# EAGLE board CT_schematic (EAGLE 7.6.0)

Size 100 x 80 mm. Coordinates in mm from the lower left corner, seen from the top.
Outline: 0,0 100,0 100,80 0,80 0,0
Copper layers (1*16): Top 0.035mm / dielectric 1.5mm / Bottom 0.035mm
Design rules "default": minimum track width 10mil, minimum drill 24mil, track to track 8mil, track to pad 8mil, pad to pad 8mil, via to via 8mil, smd to smd 8mil, copper to edge 40mil, drill to drill 8mil, minimum pad ring 10mil, minimum via ring 8mil, stop-mask expansion 4mil, vias tented up to drill 0mil, thermal gap 10mil

## Footprints (pad centres in the part's own frame; a part is rotated, then mirrored left to right if it is on the bottom)
C0603 = smd 0.8 x 0.8: 1 -0.762,0; 2 0.762,0
C0402 = smd 0.5 x 0.5: 1 -0.508,0; 2 0.508,0
C1206 = smd 1.3 x 1.6: 1 -1.524,0; 2 1.524,0
C1210 = smd 1.2 x 2.5: 1 -1.524,0; 2 1.524,0
EXV-9H = smd 3.505 x 1.676: 1 -2.857,0; 2 2.857,0
L0603 = smd 0.8 x 0.8: 1 -0.762,0; 2 0.762,0
PJ-037B_PACKAGE = drill 3.7 square: 1 12,0 | drill 3.2 square: 2 6,0
R0603 = smd 0.8 x 0.8: 1 -0.762,0; 2 0.762,0
LQFP208 = smd 0.3 x 1.2: 1 -12.75,-14.4; 2 -12.25,-14.4; 3 -11.75,-14.4; 4 -11.25,-14.4; 5 -10.75,-14.4; 6 -10.25,-14.4; 7 -9.75,-14.4; 8 -9.25,-14.4; 9 -8.75,-14.4; 10 -8.25,-14.4; 11 -7.75,-14.4; 12 -7.25,-14.4; 13 -6.75,-14.4; 14 -6.25,-14.4; 15 -5.75,-14.4; 16 -5.25,-14.4; 17 -4.75,-14.4; 18 -4.25,-14.4; 19 -3.75,-14.4; 20 -3.25,-14.4; 21 -2.75,-14.4; 22 -2.25,-14.4; 23 -1.75,-14.4; 24 -1.25,-14.4; 25 -0.75,-14.4; 26 -0.25,-14.4; 27 0.25,-14.4; 28 0.75,-14.4; 29 1.25,-14.4; 30 1.75,-14.4; 31 2.25,-14.4; 32 2.75,-14.4; 33 3.25,-14.4; 34 3.75,-14.4; 35 4.25,-14.4; 36 4.75,-14.4; 37 5.25,-14.4; 38 5.75,-14.4; 39 6.25,-14.4; 40 6.75,-14.4; 41 7.25,-14.4; 42 7.75,-14.4; 43 8.25,-14.4; 44 8.75,-14.4; 45 9.25,-14.4; 46 9.75,-14.4; 47 10.25,-14.4; 48 10.75,-14.4; 49 11.25,-14.4; 50 11.75,-14.4; 51 12.25,-14.4; 52 12.75,-14.4; 105 12.75,14.4; 106 12.25,14.4; 107 11.75,14.4; 108 11.25,14.4; 109 10.75,14.4; 110 10.25,14.4; 111 9.75,14.4; 112 9.25,14.4; 113 8.75,14.4; 114 8.25,14.4; 115 7.75,14.4; 116 7.25,14.4; 117 6.75,14.4; 118 6.25,14.4; 119 5.75,14.4; 120 5.25,14.4; 121 4.75,14.4; 122 4.25,14.4; 123 3.75,14.4; 124 3.25,14.4; 125 2.75,14.4; 126 2.25,14.4; 127 1.75,14.4; 128 1.25,14.4; 129 0.75,14.4; 130 0.25,14.4; 131 -0.25,14.4; 132 -0.75,14.4; 133 -1.25,14.4; 134 -1.75,14.4; 135 -2.25,14.4; 136 -2.75,14.4; 137 -3.25,14.4; 138 -3.75,14.4; 139 -4.25,14.4; 140 -4.75,14.4; 141 -5.25,14.4; 142 -5.75,14.4; 143 -6.25,14.4; 144 -6.75,14.4; 145 -7.25,14.4; 146 -7.75,14.4; 147 -8.25,14.4; 148 -8.75,14.4; 149 -9.25,14.4; 150 -9.75,14.4; 151 -10.25,14.4; 152 -10.75,14.4; 153 -11.25,14.4; 154 -11.75,14.4; 155 -12.25,14.4; 156 -12.75,14.4 | smd 1.2 x 0.3: 53 14.4,-12.75; 54 14.4,-12.25; 55 14.4,-11.75; 56 14.4,-11.25; 57 14.4,-10.75; 58 14.4,-10.25; 59 14.4,-9.75; 60 14.4,-9.25; 61 14.4,-8.75; 62 14.4,-8.25; 63 14.4,-7.75; 64 14.4,-7.25; 65 14.4,-6.75; 66 14.4,-6.25; 67 14.4,-5.75; 68 14.4,-5.25; 69 14.4,-4.75; 70 14.4,-4.25; 71 14.4,-3.75; 72 14.4,-3.25; 73 14.4,-2.75; 74 14.4,-2.25; 75 14.4,-1.75; 76 14.4,-1.25; 77 14.4,-0.75; 78 14.4,-0.25; 79 14.4,0.25; 80 14.4,0.75; 81 14.4,1.25; 82 14.4,1.75; 83 14.4,2.25; 84 14.4,2.75; 85 14.4,3.25; 86 14.4,3.75; 87 14.4,4.25; 88 14.4,4.75; 89 14.4,5.25; 90 14.4,5.75; 91 14.4,6.25; 92 14.4,6.75; 93 14.4,7.25; 94 14.4,7.75; 95 14.4,8.25; 96 14.4,8.75; 97 14.4,9.25; 98 14.4,9.75; 99 14.4,10.25; 100 14.4,10.75; 101 14.4,11.25; 102 14.4,11.75; 103 14.4,12.25; 104 14.4,12.75; 157 -14.4,12.75; 158 -14.4,12.25; 159 -14.4,11.75; 160 -14.4,11.25; 161 -14.4,10.75; 162 -14.4,10.25; 163 -14.4,9.75; 164 -14.4,9.25; 165 -14.4,8.75; 166 -14.4,8.25; 167 -14.4,7.75; 168 -14.4,7.25; 169 -14.4,6.75; 170 -14.4,6.25; 171 -14.4,5.75; 172 -14.4,5.25; 173 -14.4,4.75; 174 -14.4,4.25; 175 -14.4,3.75; 176 -14.4,3.25; 177 -14.4,2.75; 178 -14.4,2.25; 179 -14.4,1.75; 180 -14.4,1.25; 181 -14.4,0.75; 182 -14.4,0.25; 183 -14.4,-0.25; 184 -14.4,-0.75; 185 -14.4,-1.25; 186 -14.4,-1.75; 187 -14.4,-2.25; 188 -14.4,-2.75; 189 -14.4,-3.25; 190 -14.4,-3.75; 191 -14.4,-4.25; 192 -14.4,-4.75; 193 -14.4,-5.25; 194 -14.4,-5.75; 195 -14.4,-6.25; 196 -14.4,-6.75; 197 -14.4,-7.25; 198 -14.4,-7.75; 199 -14.4,-8.25; 200 -14.4,-8.75; 201 -14.4,-9.25; 202 -14.4,-9.75; 203 -14.4,-10.25; 204 -14.4,-10.75; 205 -14.4,-11.25; 206 -14.4,-11.75; 207 -14.4,-12.25; 208 -14.4,-12.75
SOT-23-8 = smd 0.4 x 1.2: 1 -0.975,-1.3; 2 -0.325,-1.3; 3 0.325,-1.3; 4 0.975,-1.3; 5 0.975,1.3; 6 0.325,1.3; 7 -0.325,1.3; 8 -0.975,1.3
182-009-MALE = drill 1.194 pad 1.524 octagon: 1 -5.537,10.923; 2 -2.769,10.923; 3 0,10.923; 4 2.769,10.923; 5 5.537,10.923; 6 -4.153,8.08; 7 -1.384,8.08; 8 1.384,8.08; 9 4.153,8.08 | hole 3.048: -12.446,9.501; 12.446,9.501
MBH7BLZ02-109004 = smd 0.5 x 0.5: 1 0,0; 15 9.85,0; 27 9.85,8.45; 41 0,8.45 | smd 0.45 x 0.5: 2 0.725,0; 3 1.425,0; 4 2.125,0; 5 2.825,0; 6 3.525,0; 7 4.225,0; 8 4.925,0; 9 5.625,0; 10 6.325,0; 11 7.025,0; 12 7.725,0; 13 8.425,0; 14 9.125,0 | smd 0.5 x 0.45: 16 9.85,0.725; 17 9.85,1.425; 18 9.85,2.125; 19 9.85,2.825; 20 9.85,3.525; 21 9.85,4.225; 22 9.85,4.925; 23 9.85,5.625; 24 9.85,6.325; 25 9.85,7.025; 26 9.85,7.725; 28 9.15,8.45; 29 8.45,8.45; 30 7.75,8.45; 31 7.05,8.45; 32 6.35,8.45; 33 5.65,8.45; 34 4.95,8.45; 35 4.25,8.45; 36 3.55,8.45; 37 2.85,8.45; 38 2.15,8.45; 39 1.45,8.45; 40 0.75,8.45; 42 0,7.75; 43 0,7.05; 44 0,6.35; 45 0,5.65; 46 0,4.95; 47 0,4.25; 48 0,3.55; 49 0,2.85; 50 0,2.15; 51 0,1.45; 52 0,0.75 | smd 3 x 2.5: 53 3.225,2.775; 54 6.625,2.775; 55 6.625,5.675; 56 3.225,5.675
VFBGA-63 = smd 0.4 x 0.4: A1 -3.6,4.4; A2 -2.8,4.4; A9 2.8,4.4; A10 3.6,4.4; B1 -3.6,3.6; B9 2.8,3.6; B10 3.6,3.6; C3 -2,2.8; C4 -1.2,2.8; C5 -0.4,2.8; C6 0.4,2.8; C7 1.2,2.8; C8 2,2.8; D3 -2,2; D4 -1.2,2; D5 -0.4,2; D6 0.4,2; D7 1.2,2; D8 2,2; E3 -2,1.2; E4 -1.2,1.2; E5 -0.4,1.2; E6 0.4,1.2; E7 1.2,1.2; E8 2,1.2; F3 -2,0.4; F4 -1.2,0.4; F5 -0.4,0.4; F6 0.4,0.4; F7 1.2,0.4; F8 2,0.4; G3 -2,-0.4; G4 -1.2,-0.4; G5 -0.4,-0.4; G6 0.4,-0.4; G7 1.2,-0.4; G8 2,-0.4; H3 -2,-1.2; H4 -1.2,-1.2; H5 -0.4,-1.2; H6 0.4,-1.2; H7 1.2,-1.2; H8 2,-1.2; J3 -2,-2; J4 -1.2,-2; J5 -0.4,-2; J6 0.4,-2; J7 1.2,-2; J8 2,-2; K3 -2,-2.8; K4 -1.2,-2.8; K5 -0.4,-2.8; K6 0.4,-2.8; K7 1.2,-2.8; K8 2,-2.8; L1 -3.6,-3.6; L2 -2.8,-3.6; L9 2.8,-3.6; L10 3.6,-3.6; M1 -3.6,-4.4; M2 -2.8,-4.4; M9 2.8,-4.4; M10 3.6,-4.4
S25FL128SDSMFI000 = smd 0.5 x 1.6: 1 0,0; 2 1.27,0; 3 2.54,0; 4 3.81,0; 5 5.08,0; 6 6.35,0; 7 7.62,0; 8 8.89,0; 9 8.89,8.9; 10 7.62,8.9; 11 6.35,8.9; 12 5.08,8.9; 13 3.81,8.9; 14 2.54,8.9; 15 1.27,8.9; 16 0,8.9
ABLS-25.000MHZ-B2F-T = smd 5.6 x 2.8: 1 -3.81,0; 2 5.69,0
ASEK = smd 1.4 x 1: 1 -1.1,-0.8; 2 1.1,-0.8; 3 1.1,0.8; 4 -1.1,0.8
WSON-8 = smd 0.3 x 0.6: 1 -0.75,0; 2 0.05,0; 3 0.85,0; 4 1.65,0; 5 1.65,3.8; 6 0.85,3.8; 7 0.05,3.8; 8 -0.75,3.8 | smd 3 x 2.6: PAD 0.45,1.9
SON-6 = smd 0.55 x 0.3: 1 -0.355,0.5 | smd 0.52 x 0.3: 2 -0.37,0; 3 -0.37,-0.5; 4 0.37,-0.5; 5 0.37,0; 6 0.37,0.5
SW_4-1437565-2 = smd 1.4 x 2.1: 1 -2.23,4.55; 2 -2.23,-4.55; 3 2.23,4.55; 4 2.23,-4.55
LGM67K-G1J2-24-Z = smd 0.8 x 1.4: A -2,0; C 0,0
NC7SZ125M5X = smd 1.3 x 0.7: 1 -1.3,0.95; 2 -1.3,0; 3 -1.3,-0.95; 4 1.3,-0.95; 5 1.3,0.95
DUMMY_PACKAGE_198 = drill 0.3: 1 0,-1; 2 1.5,-1

## Placement (x,y rotation side)
C1  1e-06  [C0603]  -44.45,76.2 0 top  (outside the outline)
C2  1e-07  [C0603]  -48.26,76.2 0 top  (outside the outline)
C3  1e-07  [C0603]  -52.07,76.2 0 top  (outside the outline)
C4  1e-07  [C0603]  -55.88,76.2 0 top  (outside the outline)
C5  1e-07  [C0603]  -59.69,76.2 0 top  (outside the outline)
C6  1e-07  [C0603]  -63.5,76.2 0 top  (outside the outline)
C7  1e-07  [C0603]  -67.31,76.2 0 top  (outside the outline)
C8  1e-07  [C0603]  -71.12,76.2 0 top  (outside the outline)
C9  1e-07  [C0603]  -74.93,76.2 0 top  (outside the outline)
C10  1e-07  [C0603]  -78.74,76.2 0 top  (outside the outline)
C11  1e-07  [C0603]  -82.55,76.2 0 top  (outside the outline)
C12  1e-07  [C0603]  -15.24,81.28 0 top  (outside the outline)
C13  1e-07  [C0603]  -19.05,81.28 0 top  (outside the outline)
C14  1e-07  [C0603]  -22.86,81.28 0 top  (outside the outline)
C15  1e-07  [C0603]  -26.67,81.28 0 top  (outside the outline)
C16  1e-07  [C0603]  -30.48,81.28 0 top  (outside the outline)
C17  1e-07  [C0603]  -34.29,81.28 0 top  (outside the outline)
C18  1e-07  [C0603]  -38.1,81.28 0 top  (outside the outline)
C19  1e-07  [C0603]  -41.91,81.28 0 top  (outside the outline)
C20  4.7e-06  [C0603]  -29.21,76.2 0 top  (outside the outline)
C21  1e-07  [C0603]  -45.72,81.28 0 top  (outside the outline)
C22  2.2e-06  [C0603]  -33.02,76.2 0 top  (outside the outline)
C23  2.2e-06  [C0603]  -36.83,76.2 0 top  (outside the outline)
C24  1e-08  [C0603]  -49.53,81.28 0 top  (outside the outline)
C25  1e-06  [C0603]  -53.34,81.28 0 top  (outside the outline)
C26  1e-07  [C0603]  -57.15,81.28 0 top  (outside the outline)
C27  1e-11  [C0402]  -30.48,86.36 0 top  (outside the outline)
C28  1e-11  [C0402]  -34.29,86.36 0 top  (outside the outline)
C29  1e-07  [C0402]  -38.1,86.36 0 top  (outside the outline)
C30  1e-07  [C0402]  -41.91,86.36 0 top  (outside the outline)
C31  1e-07  [C0402]  -45.72,86.36 0 top  (outside the outline)
C32  1e-07  [C0402]  -49.53,86.36 0 top  (outside the outline)
C33  1e-07  [C0402]  -53.34,86.36 0 top  (outside the outline)
C34  1e-07  [C0402]  -57.15,86.36 0 top  (outside the outline)
C35  1e-07  [C0402]  -60.96,86.36 0 top  (outside the outline)
C36  2.2e-06  [C0603]  -40.64,76.2 0 top  (outside the outline)
C37  1e-06  [C0603]  -60.96,81.28 0 top  (outside the outline)
C38  1e-06  [C0603]  -64.77,81.28 0 top  (outside the outline)
C39  1e-08  [C0402]  -64.77,86.36 0 top  (outside the outline)
C40  1e-08  [C0402]  -68.58,86.36 0 top  (outside the outline)
C41  1e-05  [C1206]  -66.04,62.23 0 top  (outside the outline)
C42  1e-05  [C1210]  -59.69,62.23 0 top  (outside the outline)
C43  1e-07  [C0402]  -72.39,86.36 0 top  (outside the outline)
C44  0.0001  [EXV-9H]  -77.47,50.8 0 top  (outside the outline)
C45  0.0001  [EXV-9H]  -17.78,63.5 0 top  (outside the outline)
C46  1e-08  [C0402]  -76.2,86.36 0 top  (outside the outline)
C47  1e-08  [C0402]  -80.01,86.36 0 top  (outside the outline)
C48  1e-08  [C0402]  -83.82,86.36 0 top  (outside the outline)
F1  240.0  [L0603]  -68.58,81.28 0 top  (outside the outline)
J1  PJ-037B  [PJ-037B_PACKAGE]  -48.26,38.1 0 top  (outside the outline)
R2  1000.0  [R0603]  -72.39,81.28 0 top  (outside the outline)
R4  4700.0  [R0603]  -76.2,81.28 0 top  (outside the outline)
R5  4700.0  [R0603]  -80.01,81.28 0 top  (outside the outline)
R6  4700.0  [R0603]  -83.82,81.28 0 top  (outside the outline)
R7  10000.0  [R0603]  -43.18,69.85 0 top  (outside the outline)
R8  10000.0  [R0603]  -48.26,69.85 0 top  (outside the outline)
R9  120.0  [R0603]  -15.24,86.36 0 top  (outside the outline)
R10  10000.0  [R0603]  -53.34,69.85 0 top  (outside the outline)
R11  10000.0  [R0603]  -58.42,69.85 0 top  (outside the outline)
R12  10000.0  [R0603]  -63.5,69.85 0 top  (outside the outline)
R13  10000.0  [R0603]  -68.58,69.85 0 top  (outside the outline)
R14  10000.0  [R0603]  -73.66,69.85 0 top  (outside the outline)
R15  10000.0  [R0603]  -78.74,69.85 0 top  (outside the outline)
R16  10000.0  [R0603]  -83.82,69.85 0 top  (outside the outline)
R17  10000.0  [R0603]  -15.24,76.2 0 top  (outside the outline)
R18  100000.0  [R0603]  -27.94,69.85 0 top  (outside the outline)
R19  2231.0  [R0603]  -19.05,86.36 0 top  (outside the outline)
R20  1000.0  [R0603]  -22.86,86.36 0 top  (outside the outline)
R21  10000.0  [R0603]  -20.32,76.2 0 top  (outside the outline)
R22  10000.0  [R0603]  -25.4,76.2 0 top  (outside the outline)
R23  9100.0  [R0603]  -26.67,86.36 0 top  (outside the outline)
R24  680000.0  [R0603]  -33.02,69.85 0 top  (outside the outline)
R25  120000.0  [R0603]  -38.1,69.85 0 top  (outside the outline)
U1  STM32F769BGT6  [LQFP208]  -27.94,15.24 0 top  (outside the outline)
U2  MAX3051EKA+T  [SOT-23-8]  -71.12,62.23 0 top  (outside the outline)
U3  182-009-113R531  [182-009-MALE]  -66.04,6.35 0 top  (outside the outline)
U4  MBH7BLZ02-109004  [MBH7BLZ02-109004]  -83.82,31.75 0 top  (outside the outline)
U5  mt29f4g08abadah4  [VFBGA-63]  -54.61,36.83 0 top  (outside the outline)
U6  S25FL128SDSMFI000  [S25FL128SDSMFI000]  -31.75,34.29 0 top  (outside the outline)
U7  ABLS-25.000MHZ-B2F-T  [ABLS-25.000MHZ-B2F-T]  -36.83,63.5 0 top  (outside the outline)
U8  ASEK-32.768KHz-ECST  [ASEK]  -68.58,50.8 0 top  (outside the outline)
U9  LP3878SDX-ADJ/NOPB  [WSON-8]  -49.53,49.53 0 top  (outside the outline)
U10  TPS3895ADRYR  [SON-6]  -17.78,90.17 0 top  (outside the outline)
U11  4-1437565-2  [SW_4-1437565-2]  -27.94,53.34 0 top  (outside the outline)
U12  Q65110A2395  [LGM67K-G1J2-24-Z]  -48.26,62.23 0 top  (outside the outline)
U13  nc7sz125m5x  [NC7SZ125M5X]  -76.2,60.96 0 top  (outside the outline)
U14  nc7sz125m5x  [NC7SZ125M5X]  -15.24,69.85 0 top  (outside the outline)
U15  nc7sz125m5x  [NC7SZ125M5X]  -21.59,69.85 0 top  (outside the outline)
U16  Dummy  [DUMMY_PACKAGE_198]  -15.24,91.44 0 top  (outside the outline)

## Library data of the parts
C1-C48 F1 J1 R2 R4-R25 U1-U16 = circuit_tree

## Nets
CLK_CRYSTAL_U1_32: C27.1 U1.32 U7.1
CLK_CRYSTAL_U1_33: C28.1 U1.33 U7.2
CLK_U1_9: U1.9 U8.3
GND: C1.2 C2.2 C3.2 C4.2 C5.2 C6.2 C7.2 C8.2 C9.2 C10.2 C11.2 C12.2 C13.2 C14.2 C15.2 C16.2 C17.2 C18.2 C19.2 C20.2 C21.2 C22.2 C23.2 C24.2 C25.2 C26.2 C27.2 C28.2 C29.2 C30.2 C31.2 C32.2 C33.2 C34.2 C35.2 C36.2 C37.2 C38.2 C39.2 C40.2 C41.2 C42.2 C43.2 C44.2 C45.2 C46.2 C47.2 C48.2 J1.2 R2.2 R7.2 R20.2 R23.2 R25.2 U1.14 U1.25 U1.40 U1.51 U1.60 U1.72 U1.82 U1.93 U1.114 U1.122 U1.128 U1.136 U1.149 U1.170 U1.184 U1.202 U2.2 U2.8 U3.5 U4.1 U4.3 U4.15 U4.27 U4.29 U4.41 U4.42 U4.43 U4.44 U4.45 U4.46 U4.47 U4.48 U4.49 U4.50 U4.52 U4.53 U4.54 U4.55 U4.56 U5.C5 U5.F7 U5.K3 U5.K8 U6.10 U8.2 U9.3 U9.PAD U10.2 U12.C U13.1 U13.3 U14.1 U14.3 U15.1 U15.3 U16.1
NET_U1_34: R6.1 U1.34 U15.4
NET_U1_42: C24.1 C25.1 F1.1 U1.41 U1.42
NET_U1_92: C22.1 U1.92
NET_U1_119: U1.119
NET_U1_125: U1.125
NET_U1_148: C23.1 U1.148
NET_U1_197: R7.1 U1.197
NET_U1_203: R8.1 U1.203
NET_U1_207: U12.A
NET_U1_208: U11.3 U11.4
NET_U2_6: R9.2 U2.6
NET_U3_2: R9.2 U2.6 U3.2
NET_U3_3: R9.1 U2.7 U3.3
NET_U4_39: R5.1 U4.39 U14.4
NET_U5_C3: R14.1 U5.C3
NET_U6_3: R4.1 U6.3 U13.4
NET_U9_1: C40.1 U9.1
NET_U9_6: R19.2 R20.1 U9.6
NET_U9_8: R18.1 U9.8
NET_U10_1: R22.1 R23.1 U10.1
NET_U10_3: R24.2 R25.1 U10.3
NET_U10_4: R21.1 U10.4 U13.2 U14.2 U15.2
NET_U11_1: R2.1 U11.1 U11.2
PROC_CAN1_RX: U1.11 U2.4
PROC_CAN1_TX: U1.146 U2.1
PROC_DAC_OUT2: U1.54 U16.2
PROC_FMC_A16: U1.111 U5.D5
PROC_FMC_A17: U1.112 U5.C4
PROC_FMC_D0: U1.116 U5.H4
PROC_FMC_D1: U1.117 U5.J4
PROC_FMC_D2: U1.164 U5.K4
PROC_FMC_D3: U1.165 U5.K5
PROC_FMC_D4: U1.79 U5.K6
PROC_FMC_D5: U1.80 U5.J7
PROC_FMC_D6: U1.81 U5.K7
PROC_FMC_D7: U1.84 U5.J8
PROC_FMC_INT: R10.1 U1.134 U5.C8
PROC_FMC_NCE: R11.1 U1.140 U5.C6
PROC_FMC_NOE: R13.1 U1.168 U5.D4
PROC_FMC_NWE: R12.1 U1.169 U5.C7
PROC_QUADSPI_BK1_IO0: U1.29 U6.15
PROC_QUADSPI_BK1_IO1: U1.30 U6.8
PROC_QUADSPI_BK1_IO2: R16.1 U1.1 U6.9
PROC_QUADSPI_BK1_IO3: R17.1 U1.27 U6.1
PROC_QUADSPI_BK1_NCS: R15.1 U1.90 U6.7
PROC_QUADSPI_CLK: U1.31 U6.16
PROC_UART4_CTS: U1.61 U4.26
PROC_UART4_RTS: U1.106 U4.24
PROC_UART4_RX: U1.44 U4.25
PROC_UART4_TX: U1.43 U4.23
VCC_S1_7V0: C41.1 C44.1 C45.1 J1.1 R18.2 U9.4
VCC_TIER1_3V3: C1.1 C2.1 C3.1 C4.1 C5.1 C6.1 C7.1 C8.1 C9.1 C10.1 C11.1 C12.1 C13.1 C14.1 C15.1 C16.1 C17.1 C18.1 C19.1 C20.1 C21.1 C26.1 C29.1 C30.1 C31.1 C32.1 C33.1 C34.1 C35.1 C36.1 C37.1 C38.1 C39.1 C42.1 C43.1 C46.1 C47.1 C48.1 F1.2 R4.2 R5.2 R6.2 R8.2 R10.2 R11.2 R12.2 R13.2 R14.2 R15.2 R16.2 R17.2 R19.1 R21.2 R22.2 R24.1 U1.6 U1.15 U1.26 U1.39 U1.52 U1.59 U1.73 U1.83 U1.94 U1.103 U1.115 U1.118 U1.137 U1.150 U1.158 U1.171 U1.185 U1.204 U2.3 U4.28 U5.D3 U5.G4 U5.H8 U5.J6 U6.2 U6.14 U8.4 U9.5 U10.6 U13.5 U14.5 U15.5

## Tracks (layer width: path | path; a pad name or v marks a point on that pad's centre or on a via)
CLK_CRYSTAL_U1_32  (2 unrouted)
CLK_CRYSTAL_U1_33  (2 unrouted)
CLK_U1_9  (1 unrouted)
GND  (109 unrouted)
NET_U1_34  (2 unrouted)
NET_U1_42  (4 unrouted)
NET_U1_92  (1 unrouted)
NET_U1_148  (1 unrouted)
NET_U1_197  (1 unrouted)
NET_U1_203  (1 unrouted)
NET_U1_208  (1 unrouted)
NET_U2_6  (1 unrouted)
NET_U3_2  (2 unrouted)
NET_U3_3  (2 unrouted)
NET_U4_39  (2 unrouted)
NET_U5_C3  (1 unrouted)
NET_U6_3  (2 unrouted)
NET_U9_1  (1 unrouted)
NET_U9_6  (2 unrouted)
NET_U9_8  (1 unrouted)
NET_U10_1  (2 unrouted)
NET_U10_3  (2 unrouted)
NET_U10_4  (4 unrouted)
NET_U11_1  (2 unrouted)
PROC_CAN1_RX  (1 unrouted)
PROC_CAN1_TX  (1 unrouted)
PROC_DAC_OUT2  (1 unrouted)
PROC_FMC_A16  (1 unrouted)
PROC_FMC_A17  (1 unrouted)
PROC_FMC_D0  (1 unrouted)
PROC_FMC_D1  (1 unrouted)
PROC_FMC_D2  (1 unrouted)
PROC_FMC_D3  (1 unrouted)
PROC_FMC_D4  (1 unrouted)
PROC_FMC_D5  (1 unrouted)
PROC_FMC_D6  (1 unrouted)
PROC_FMC_D7  (1 unrouted)
PROC_FMC_INT  (2 unrouted)
PROC_FMC_NCE  (2 unrouted)
PROC_FMC_NOE  (2 unrouted)
PROC_FMC_NWE  (2 unrouted)
PROC_QUADSPI_BK1_IO0  (1 unrouted)
PROC_QUADSPI_BK1_IO1  (1 unrouted)
PROC_QUADSPI_BK1_IO2  (2 unrouted)
PROC_QUADSPI_BK1_IO3  (2 unrouted)
PROC_QUADSPI_BK1_NCS  (2 unrouted)
PROC_QUADSPI_CLK  (1 unrouted)
PROC_UART4_CTS  (1 unrouted)
PROC_UART4_RTS  (1 unrouted)
PROC_UART4_RX  (1 unrouted)
PROC_UART4_TX  (1 unrouted)
VCC_S1_7V0  (5 unrouted)
VCC_TIER1_3V3  (86 unrouted)